# EAGLE board US (EAGLE 8.5.1)
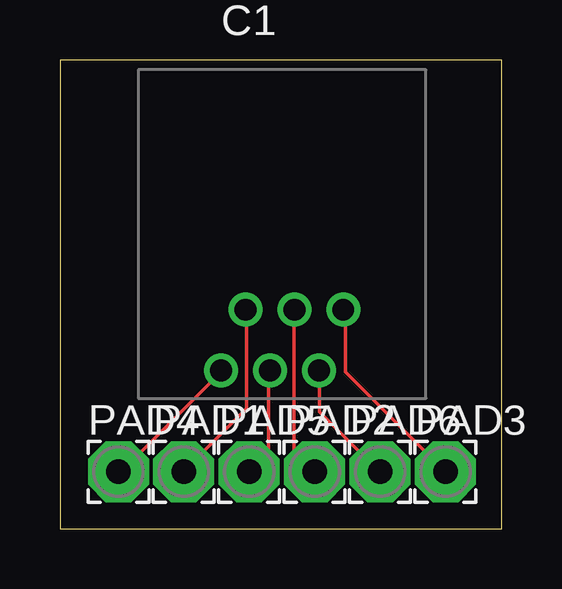
[diagram p0: board, top side]

Size 18.42 x 19.56 mm. Coordinates in mm from the lower left corner, seen from the top.
Outline: 0.01,0 18.42,0 18.42,19.56 0,19.56 0.01,0
Copper layers (1*16): Top 0.035mm / dielectric 1.5mm / Bottom 0.035mm
Design rules "default": minimum track width 6mil, minimum drill 0.35mm, track to track 6mil, track to pad 6mil, pad to pad 6mil, via to via 6mil, smd to smd 6mil, copper to edge 40mil, drill to drill 6mil, minimum pad ring 10mil, minimum via ring 8mil, stop-mask expansion 4mil, vias tented up to drill 0mil, thermal gap 10mil

## Footprints (pad centres in the part's own frame; a part is rotated, then mirrored left to right if it is on the bottom)
6P6C_FEMALE = drill 0.9 pad 1.3: 1 -1.53,1.27; 2 0.51,1.27; 3 2.55,1.27; 4 -2.55,-1.27; 5 -0.51,-1.27; 6 1.53,-1.27
2,54/1,0 = drill 1.016 pad 2.54 octagon: 1 0,0

## Placement (x,y rotation side)
C1  [6P6C_FEMALE]  9.27,7.88 0 top
PAD1  [2,54/1,0]  5.16,2.39 0 top
PAD2  [2,54/1,0]  10.62,2.39 0 top
PAD3  [2,54/1,0]  16.08,2.39 0 top
PAD4  [2,54/1,0]  2.44,2.39 0 top
PAD5  [2,54/1,0]  7.89,2.39 0 top
PAD6  [2,54/1,0]  13.35,2.39 0 top

## Library data of the parts
C1 = Yijiano
PAD1-PAD6 = wirepad

## Nets
N$1: C1.1 PAD1.1
N$2: C1.2 PAD2.1
N$3: C1.3 PAD3.1
N$4: C1.4 PAD4.1
N$5: C1.5 PAD5.1
N$6: C1.6 PAD6.1

## Tracks (layer width: path | path; a pad name or v marks a point on that pad's centre or on a via)
N$1
  Top 0.152: C1.1 7.78,9.14 7.78,5.03 5.19,2.44 PAD1.1
N$2
  Top 0.152: C1.2 9.76,9.14 9.76,3.2 10.53,2.44 PAD2.1
N$3
  Top 0.152: C1.3 11.9,9.14 11.9,6.55 16.01,2.44 PAD3.1
N$4
  Top 0.152: C1.4 6.72,6.55 2.45,2.29 PAD4.1
N$5
  Top 0.152: C1.5 8.7,6.55 8.7,3.2 7.93,2.44 PAD5.1
N$6
  Top 0.152: C1.6 10.83,6.55 10.83,4.88 13.27,2.44 PAD6.1